# EAGLE board 612_jetracer_328_211 (EAGLE 9.6.0)
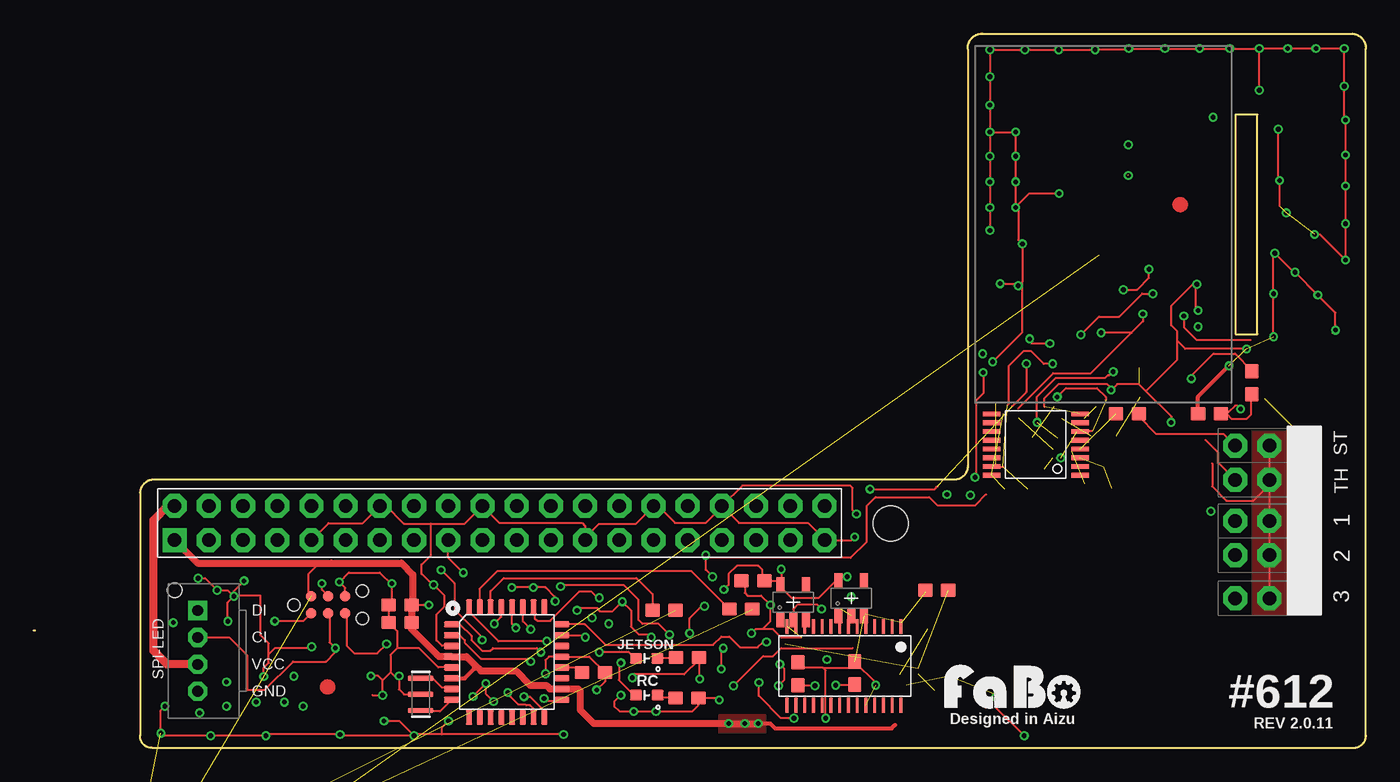
[diagram p0: board, top side]
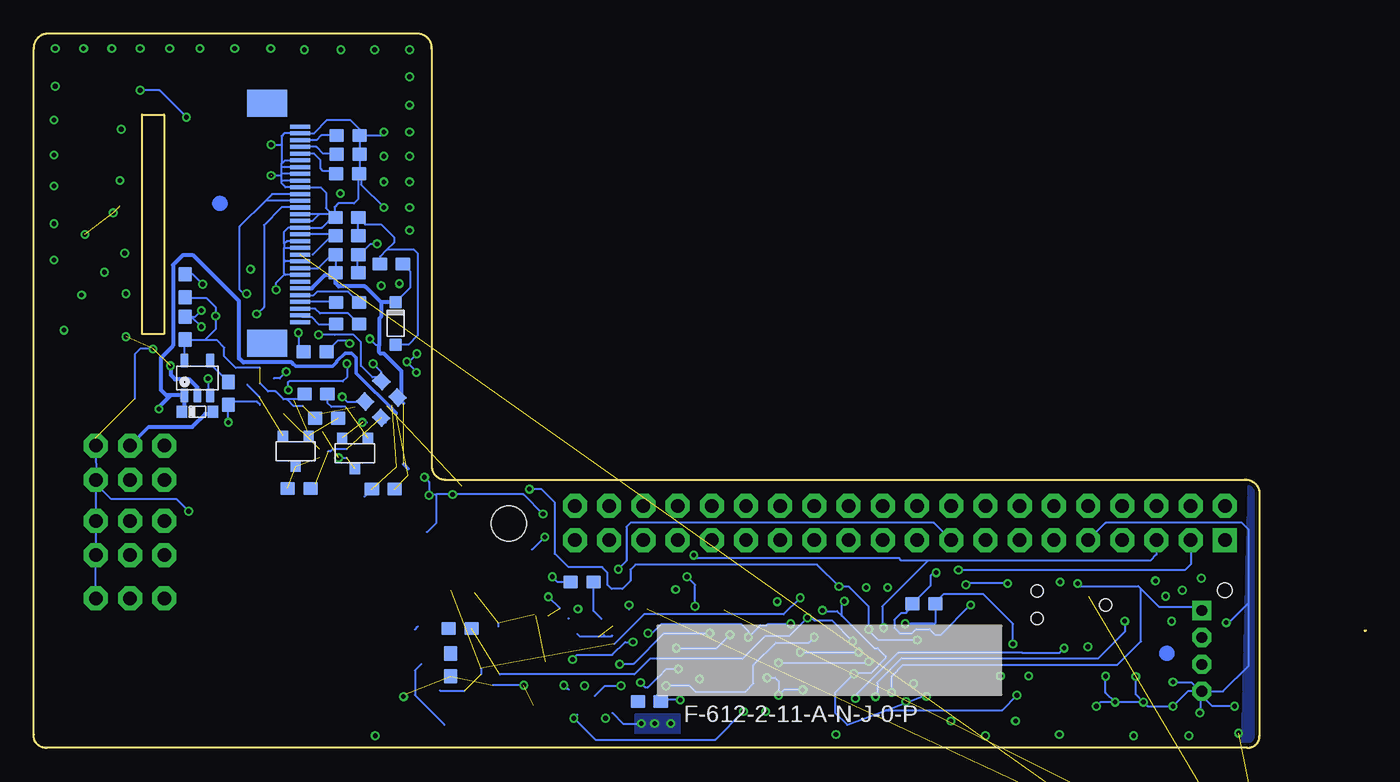
[diagram p1: board, bottom side, seen from below]

Size 98.91 x 53.01 mm. Coordinates in mm from the lower left corner, seen from the top.
Outline: 0.1,8.71 0,8.71
Outline: 69.35,51.86 69.35,20.91 arc-90 68.35,19.91 8.95,19.91 arc90 7.9,18.91 7.9,0.91 arc97 8.8,0.01 97.9,0.01 arc103 98.9,1.01 98.9,51.86 arc91 97.9,53.01 70.45,53.01 arc95 69.35,51.86
Outline: 90.87,30.72 90.87,47 89.23,47 89.23,30.72 90.87,30.72
Copper layers (1*16): Top 0.035mm / dielectric 1.6mm / Bottom 0.035mm
Design rules "PCBway": minimum track width 6mil, minimum drill 12mil, track to track 6mil, track to pad 6mil, pad to pad 6mil, via to via 6mil, smd to smd 6mil, copper to edge 10mil, drill to drill 10mil, minimum pad ring 10mil, minimum via ring 6mil, stop-mask expansion 2mil, vias tented up to drill 100mil, thermal gap 8mil
Holes 2.6 mm at 63.63,16.65
bRestrict: 8 lines

## Footprints (pad centres in the part's own frame; a part is rotated, then mirrored left to right if it is on the bottom)
FABO_BRICK_3PIN_HEADER = drill 1 pad 1.778 octagon: GND -2.54,0; I/O 2.54,0; VCC 0,0
0603 = smd 1.1 x 1: 1 -0.85,0; 2 0.85,0
0603-BOTTOM = smd 1.1 x 1 bottom: 1 -0.85,0; 2 0.85,0
1N4148W = smd 0.9 x 0.95: ANODE 0,0; CATHODE 3.15,0
CUS05F40 = smd 0.8 x 0.9: A -1.15,0; C 1.15,0
TQFP-32 = smd 1.1 x 0.45: 1 -4.1,2.8; 2 -4.1,2; 3 -4.1,1.2; 4 -4.1,0.4; 5 -4.1,-0.4; 6 -4.1,-1.2; 7 -4.1,-2; 8 -4.1,-2.8; 17 4.1,-2.8; 18 4.1,-2; 19 4.1,-1.2; 20 4.1,-0.4; 21 4.1,0.4; 22 4.1,1.2; 23 4.1,2; 24 4.1,2.8 | smd 0.45 x 1.1: 9 -2.8,-4.1; 10 -2,-4.1; 11 -1.2,-4.1; 12 -0.4,-4.1; 13 0.4,-4.1; 14 1.2,-4.1; 15 2,-4.1; 16 2.8,-4.1; 25 2.8,4.1; 26 2,4.1; 27 1.2,4.1; 28 0.4,4.1; 29 -0.4,4.1; 30 -1.2,4.1; 31 -2,4.1; 32 -2.8,4.1
JETSON_NANO_NOBOARDER = drill 1 pad 1.778 square: 1 1.27,1.27 | drill 1 pad 1.778 octagon: 2 1.27,3.81; 3 3.81,1.27; 4 3.81,3.81; 5 6.35,1.27; 6 6.35,3.81; 7 8.89,1.27; 8 8.89,3.81; 9 11.43,1.27; 10 11.43,3.81; 11 13.97,1.27; 12 13.97,3.81; 13 16.51,1.27; 14 16.51,3.81; 15 19.05,1.27; 16 19.05,3.81; 17 21.59,1.27; 18 21.59,3.81; 19 24.13,1.27; 20 24.13,3.81; 21 26.67,1.27; 22 26.67,3.81; 23 29.21,1.27; 24 29.21,3.81; 25 31.75,1.27; 26 31.75,3.81; 27 34.29,1.27; 28 34.29,3.81; 29 36.83,1.27; 30 36.83,3.81; 31 39.37,1.27; 32 39.37,3.81; 33 41.91,1.27; 34 41.91,3.81; 35 44.45,1.27; 36 44.45,3.81; 37 46.99,1.27; 38 46.99,3.81; 39 49.53,1.27; 40 49.53,3.81
TSSOP-16 = smd 0.36 x 1.3: 1 -2.275,-3.28; 2 -1.625,-3.28; 3 -0.975,-3.28; 4 -0.325,-3.28; 5 0.325,-3.28; 6 0.975,-3.28; 7 1.625,-3.28; 8 2.275,-3.28; 9 2.275,3.28; 10 1.625,3.28; 11 0.975,3.28; 12 0.325,3.28; 13 -0.325,3.28; 14 -0.975,3.28; 15 -1.625,3.28; 16 -2.275,3.28
PCA9685 = smd 0.3 x 1.1: 1 -4.15,-2.93; 2 -3.5,-2.93; 3 -2.85,-2.93; 4 -2.2,-2.93; 5 -1.55,-2.93; 6 -0.9,-2.93; 7 -0.25,-2.93; 8 0.4,-2.93; 9 1.05,-2.93; 10 1.7,-2.93; 11 2.35,-2.93; 12 3,-2.93; 13 3.65,-2.93; 14 4.3,-2.93; 15 4.3,2.92; 16 3.65,2.92; 17 3,2.92; 18 2.35,2.92; 19 1.7,2.92; 20 1.05,2.92; 21 0.4,2.92; 22 -0.25,2.92; 23 -0.9,2.92; 24 -1.55,2.92; 25 -2.2,2.92; 26 -2.85,2.92; 27 -3.5,2.92; 28 -4.15,2.92
SOT-23-5 = smd 0.6 x 1.05: 1 -0.95,-1.3; 2 0,-1.3; 3 0.95,-1.3; 4 0.95,1.3; 5 -0.95,1.3
TC2030 = smd 0.787 x 0.787: 1 1.27,-0.635; 2 1.27,0.635; 3 2.54,-0.635; 4 2.54,0.635; 5 3.81,-0.635; 6 3.81,0.635 | hole 0.889: 0,0; 5.08,-1.016; 5.08,1.016
0603' = smd 0.9 x 0.8: ANODE -0.8,0; CATHODE 0.8,0
1X03 = drill 1.016 long: 1 -2.54,0; 2 0,0; 3 2.54,0
SUPERSOT-3 = smd 0.76 x 0.76: D 0,1.15; G -0.95,-1.15; S 0.95,-1.15
SPI-B04B-PASK-1 = drill 0.8 pad 1.422 octagon: CI 1,1.27; GND -3,1.27; VCC -1,1.27 | drill 0.8 pad 1.422 square: DI 3,1.27 | hole 1.1: 4.5,2.97
ER-CON30HT-1 = smd 0.3 x 1.5 bottom: 1 7,-0.23; 2 6.5,-0.23; 3 6,-0.23; 4 5.5,-0.23; 5 5,-0.23; 6 4.5,-0.23; 7 4,-0.23; 8 3.5,-0.23; 9 3,-0.23; 10 2.5,-0.23; 11 2,-0.23; 12 1.5,-0.23; 13 1,-0.23; 14 0.5,-0.23; 15 0,-0.23; 16 -0.5,-0.23; 17 -1,-0.23; 18 -1.5,-0.23; 19 -2,-0.23; 20 -2.5,-0.23; 21 -3,-0.23; 22 -3.5,-0.23; 23 -4,-0.23; 24 -4.5,-0.23; 25 -5,-0.23; 26 -5.5,-0.23; 27 -6,-0.23; 28 -6.5,-0.23; 29 -7,-0.23; 30 -7.5,-0.23 | smd 2 x 3 bottom: 31 -9.07,-2.67; 32 8.74,-2.67
SOT-23 = smd 1.1 x 0.6: 1 -1.3,0.95; 2 -1.3,0; 3 -1.3,-0.95; 4 1.3,-0.95; 5 1.3,0.95
CSTNE_V_C = smd 0.4 x 1.9: 1 1.2,0; 2 0,0; 3 -1.2,0

## Placement (x,y rotation side)
1  [FABO_BRICK_3PIN_HEADER]  91.75,16.84 180 top
2  [FABO_BRICK_3PIN_HEADER]  91.75,14.3 180 top
3  [FABO_BRICK_3PIN_HEADER]  91.75,11.1 180 top
C1  0.1uF  [0603]  41.57,5.6 180 top
C2  10uF  [0603]  53.2,3.44 180 bottom
C3  0.1uF  [0603-BOTTOM]  27.2,9.31 180 bottom
C5  1uF  [0603-BOTTOM]  75.6,31.46 0 top
C6  1uF  [0603-BOTTOM]  75.6,33.06 0 top
C7  1uF  [0603-BOTTOM]  75.65,35.26 0 top
C8  1uF  [0603-BOTTOM]  75.65,36.61 0 top
C9  10uF  [0603-BOTTOM]  75.55,44.06 0 top
C10  10uF  [0603-BOTTOM]  75.55,45.46 0 top
C11  10uF  [0603-BOTTOM]  75.65,39.36 180 top
C12  10uF  [0603-BOTTOM]  27.2,10.61 180 bottom
C14  0.01uF  [0603]  84.45,26.31 90 bottom
C15  2.2uF  [0603]  87.65,31.16 270 bottom
C16  0.1uF  [0603-BOTTOM]  67.95,6.16 90 top
C20  0.1uF  [0603]  72.95,19.21 0 bottom
C21  1uF  [0603]  87.3,24.81 0 top
C24  0.1uF  [0603]  87.65,34.31 270 bottom
C27  0.1uF  [0603]  53.4,12.41 180 top
C28  0.1uF  [0603]  58.2,12.31 0 bottom
D1  1N4148  [1N4148W]  72.03,29.93 90 bottom
D2  CUS05F40  [CUS05F40]  86.75,24.96 180 bottom
IC1  [TQFP-32]  35.12,6.37 0 top
IC2  JETSON_NANO_NOBORDER  [JETSON_NANO_NOBOARDER]  9.19,14.15 0 top
IC3  MULTIPLEXERSMC74HC157A  [TSSOP-16]  74.4,22.51 90 top
IC4  [PCA9685]  60.24,6.09 180 top
IC5  [SOT-23-5]  86.75,27.46 0 bottom
ICSP1  [TC2030]  19.33,10.62 0 top
JETSON  GREEN  [0603']  45.52,3.92 0 top
JP1  PINHD-1X3  [1X03]  4.09,-12.69 0 top  (outside the outline)
Q1  MOSFET-N_FDN335N  [SUPERSOT-3]  79.45,22.01 180 bottom
Q2  MOSFET-N_FDN335N  [SUPERSOT-3]  75.05,21.86 180 bottom
R1  10K  [0603]  56.75,5.51 270 top
R2  10K  [0603]  32.8,10.71 180 bottom
R3  10K  [0603]  60.95,5.56 270 top
R5  470  [0603]  48.55,6.71 180 top
R7  10k  [0603-BOTTOM]  72.35,35.91 180 top
R8  100  [0603-BOTTOM]  75.65,38.01 180 top
R9  390K  [0603-BOTTOM]  75.6,42.61 0 top
R10  1K  [0603]  48.5,3.71 180 top
R11  5.1K  [0603]  77.95,26.26 180 bottom
R12  1K  [0603]  46.8,10.21 180 top
R13  1K  [0603]  52.5,10.31 180 top
R14  10K  [0603]  73.7,25.11 315 bottom
R18  5.1K  [0603]  77.15,24.46 180 bottom
R19  10K  [0603]  79.2,19.26 0 bottom
R20  0  [0603]  81.2,24.81 0 top
R22  10K  [0603]  78,29.41 0 bottom
R23  10K  [0603]  72.48,26.61 315 bottom
R24  4.7K  [0603]  67.05,11.71 0 top
R28  10k  [0603-BOTTOM]  2.19,-18.41 0 top  (outside the outline)
R30  220  [0603]  67.25,8.86 0 bottom
R31  0  [0603]  90.45,27.11 90 top
RC  RED  [0603']  45.51,6.65 0 top
SPI-LED  FABO-SPI-LED-B04B  [SPI-B04B-PASK-1]  13.44,7.2 90 top
ST  [FABO_BRICK_3PIN_HEADER]  91.75,22.44 180 top
TH  [FABO_BRICK_3PIN_HEADER]  91.75,19.9 180 top
U1  [ER-CON30HT-1]  78.9,39.11 90 top
U$1  [MARK_POINT_3MM]  85.12,40.32 0 top
U$2  [MARK_POINT_3MM]  85.08,40.41 0 bottom
U$3  [MARK_POINT_3MM]  14.78,7.02 0 bottom
U$6  [MARK_POINT_3MM]  21.83,4.52 0 top
U$9  SN74LVC1G17  [SOT-23]  60.7,11.11 90 top
U$10  SN74LVC1G17  [SOT-23]  56.4,10.81 90 top
U$11  [LOGO_FABO_MS]  72.67,2.55 0 top
X2  16MHz  [CSTNE_V_C]  28.74,3.97 90 top

## Library data of the parts
1-3 ST TH = FaBo-Template
C1-C3 C5-C12 C14-C16 C20 C21 C27 C28 = FaBo-Capacitor
C24 = FaBo-Capacitor; SPICEPREFIX: C
D1 D2 = FaBo-Diode
IC1 ICSP1 X2 = component
IC2 = FaBo-Boards
IC3 = FaBo-Multiplexers
IC4 = FaBo-Motor
IC5 = FaBo-Supply
JETSON RC = FaBo-LED
JP1 = Connector; CATEGORY: CONNECTOR; SUB-CATEGORY: PIN-HEADER
Q1 Q2 = FaBo-Mosfet
R1-R3 R5 R7-R14 R18-R20 R22-R24 R28 R30 R31 = FaBo-Resistors
SPI-LED = FaBo-Connetor
U1 = FaBo-Display
U$1-U$3 U$6 = FaBo-etc
U$9 U$10 = FaBo-LogicIC
U$11 = FaBo-Logo

## Nets
0: 1.GND 2.GND 3.GND C14.1 C15.1 C20.1 C21.1 C24.1 IC3.8 IC3.15 IC5.2 ST.GND TH.GND
3V3: C3.2 C12.2 C27.1 C28.1 IC1.4 IC1.6 IC1.18 IC2.1 IC2.17 ICSP1.2 R2.2 R28.2 U$9.5 U$10.5
5V: IC2.2 SPI-LED.VCC
AVR_MISO: IC1.16 ICSP1.1
AVR_MOSI: IC1.15 ICSP1.4 SPI-LED.DI
AVR_RESET: IC1.29 ICSP1.5 R2.1
AVR_RX: IC1.30 R12.2
AVR_SCK: IC1.17 ICSP1.3 SPI-LED.CI
AVR_TX: IC1.31 R13.2
CE0: IC2.24
D3: IC1.1 RC.ANODE
D4: IC1.2 JETSON.ANODE
GND: C1.1 C2.1 C3.1 C7.1 C8.1 C9.1 C10.1 C11.1 C12.1 C16.1 C27.2 IC1.3 IC1.5 IC1.21 IC2.9 IC2.14 IC2.20 IC2.25 IC2.30 IC2.34 IC2.39 IC4.1 IC4.14 IC4.24 ICSP1.6 JP1.3 R1.1 R3.1 R5.1 R9.1 R10.1 R24.1 SPI-LED.GND U1.2 U1.6 U1.7 U1.8 U1.9 U1.10 U1.14 U1.15 U1.16 U1.18 U1.19 U1.21 U1.23 U$9.3 X2.2
GPIO4: IC2.7
GPIO5: IC2.29
GPIO6: IC2.31
GPIO12: IC2.32
GPIO13: IC2.33
GPIO16: IC2.36
GPIO17: IC2.11
GPIO18: IC2.12
GPIO19: IC2.35
GPIO20: IC2.38
GPIO21: IC2.40
GPIO22: IC2.15
GPIO23: IC2.16
GPIO24: IC2.18
GPIO25: IC2.22
GPIO26: IC2.37
GPIO27: IC2.13
MISO: IC2.21
MOSI: IC2.19
N$2: IC1.23
N$3: IC3.3 Q1.D R19.1
N$4: C1.2 IC1.20
N$5: IC1.8 X2.3
N$6: JP1.1 R12.1
N$7: R3.2
N$8: IC4.25
N$15: IC1.7 X2.1
N$16: C6.2 U1.27
N$17: JP1.2 R13.1
N$19: R5.2 RC.CATHODE
N$20: JETSON.CATHODE R10.2
N$21: C6.1 U1.26
N$22: C5.1 U1.28
N$23: C5.2 U1.29
N$24: R9.2 U1.5
N$25: C9.2 U1.4
N$26: C10.2 U1.3
N$27: R8.1 U1.17
N$28: C11.2 D1.ANODE R7.1 R8.2
N$31: C14.2 IC5.4
N$32: IC5.3 R31.2
N$34: Q2.S
N$35: TH.I/O
N$36: R20.2 ST.I/O
N$37: Q1.S
N$39: Q2.G R11.1
N$40: Q1.G R18.1
N$42: IC3.6 Q2.D R14.1
N$43: R30.1
N$45: IC1.24
N$48: U$9.2
N$49: U$10.2
N$50: R28.1 U1.20
N$51: IC1.32
NC0: IC2.4
NC1: IC2.6
PCH1: IC3.2
PCH2: IC3.5
PCH3: IC1.26 R24.2
PCH_1: R30.2
RCH1: IC3.4 R20.1
RCH2: IC3.7
RX: IC2.10
S$2: R14.2 R19.2
S$6: IC3.1
S$7: C7.2 C8.2 D1.CATHODE R7.2 R22.2 R23.2 U1.22 U1.25
S$8: R22.1 U1.13
S$9: IC4.4
S$10: C28.2
S$11: IC4.3
S$12: IC4.5
S$13: IC4.2
S$15: IC4.7
S$16: IC4.6
S$18: C2.2
S$19: IC4.26
S$20: IC4.23
S$21: R1.2
S$22: IC4.28
S$23: IC4.27
S$25: C16.2
SCL: IC1.28 IC2.5
SCLK: IC2.23
SDA: IC1.27 IC2.3 R23.1 U1.11 U1.12
TX: IC2.8
VCC_R: C20.2 C21.2 D2.C IC3.16 IC5.1 R31.1
VCC_RC: 1.VCC 2.VCC 3.VCC D2.A ST.VCC TH.VCC
VCC_RC1: C15.2 C24.2 IC5.5 R11.2 R18.2

## Tracks (layer width: path | path; a pad name or v marks a point on that pad's centre or on a via)
0  (via drill 0.35)  (6 unrouted)
  Top 0.152: IC3.15 71.98,20.88 | 72.3,25.43 72.4,25.54 72.4,28.34 73.51,29.46 74.05,29.46 75,28.51 v75.65,28.51 | v80,26.56 80.08,26.63 | 80.08,26.63 80.45,27.01 82.05,27.01 82.55,26.51 | 82.55,26.51 82.6,26.51 84.9,28.81 84.9,30.21 | 75.05,25.31 75.05,25.96 76.11,27.01 79.7,27.01 80.08,26.63 | 84.9,30.21 84.9,30.91 84.45,31.36 84.45,32.81 86.05,34.41 86.3,34.41 | 86.3,34.41 v86.35,34.41 | v86.45,32.46 86.3,32.61 86.3,34.41 | v90.05,29.61 85.5,29.61 84.9,30.21 | 87.25,17.56 v87.4,17.56 | v84.45,24.16 84.45,24.61 82.55,26.51 | 95.23,22.44 ST.GND | 96.45,30.81 v96.65,31.01 96.65,32.31 v95.35,33.61 v93.65,35.31 93.55,35.31 v92.15,36.71 92.05,36.61 v92.05,33.71 v92.05,30.51
  Top 0.305: C21.1 86.45,26.05 v88.75,28.35
  Bottom 0.152: 91.4,25.92 91.4,29.21 91,29.61 v90.05,29.61 | 94.33,22.99 94.33,22.48 ST.GND 94.28,19.82 TH.GND 94.29,19.61 | v80,26.56 80,27.16 79.95,27.21 75.95,27.21 75.65,27.51 v75.65,28.51 | 3.GND 2.GND 94.27,14.32 94.31,14.36 1.GND 94.31,16.96 94.29,19.61 | 88.7,28.3 v88.75,28.35 | 82.1,25.46 82.35,25.71 84.2,25.71 C14.1 v84.45,24.16 | C20.1 74.35,18.66 | v86.35,34.41 87.1,35.16 C24.1 | 87.2,32.01 86.9,32.01 v86.45,32.46 | v86.45,31.26 87.2,32.01 | 87.2,32.01 C15.1 | v87.4,17.56 88.3,18.46 93.15,18.46 94.29,19.59 94.29,19.61
  Bottom 0.305: IC5.2 86.75,26.76 87.35,27.36 88.4,27.36 88.7,27.66 88.7,28.3
3V3  (via drill 0.35)  (1 unrouted)
  Top 0.152: 28.05,11.41 28.15,11.41 | 28.15,10.61 v29.34,10.61 | ICSP1.2 20.4,11.45 20.4,12.91 21.2,13.71 22.1,13.71 | 55.42,12.48 55.35,12.41 C27.1 54.1,12.56 54.1,13.21 53.8,13.51 52.2,13.51 51.6,12.91 51.6,12.11 v51.24,11.75 | 55.42,12.48 55.52,12.58 55.52,13.22 v55.5,13.25 | v60.4,12.71 60.3,12.71 60.2,12.81 60.15,12.81 U$9.5 59.55,12.41 58.25,11.11 56.3,11.11 55.45,11.96 U$10.5 55.42,12.08 55.42,12.48 | v31.9,13.01 30.78,14.13 IC2.17
  Top 0.305: 28.05,11.41 C12.2 | 39.2,4.38 IC1.18 | v53.8,1.81 54.7,1.81 55.05,1.46 63.7,1.46 63.95,1.7 | IC1.6 32.01,5.17 32.7,5.86 32.7,6.21
  Top 0.508: IC2.1 12.17,13.71 22.1,13.71 27.3,13.71 28.15,12.86 28.15,11.41 28.15,10.61 | C12.2 C3.2 28.05,8.81 30.09,6.77 IC1.4 32.14,6.77 32.7,6.21 33.2,5.71 35.8,5.71 36.87,4.64 38.07,4.64 38.32,4.38 39.2,4.38 | v53.8,1.81 v52.8,1.81 v51.6,1.81 41.6,1.81 40.6,2.81 40.6,4.21 40.44,4.37 IC1.18
  Bottom 0.152: v29.34,10.61 31.54,8.41 32,8.41 32.4,8.81 33.4,8.81 33.7,8.51 34.6,8.51 35,8.91 35,9.51 34.5,10.01 34.15,10.01 33.65,10.57 R2.2 32.3,12.06 32.3,12.81 32.1,13.01 v31.9,13.01 | v53.8,1.81 55.15,1.81 55.94,2.6 | C28.1 60,12.31 v60.4,12.71 | IC2.17 32.07,16.71 54.6,16.71 54.9,16.41 54.9,13.91 55.5,13.31 v55.5,13.25
  pour Top (no thermals): 50.9,2.46 54.3,2.46 54.3,1.11 50.9,1.11
  pour Bottom (no thermals): 50.9,2.46 54.25,2.46 54.25,1.11 50.9,1.11
5V
  Top 0.61: SPI-LED.VCC 9.91,6.2 8.9,7.21 8.9,16.91 9.95,17.96 IC2.2
AVR_MISO  (via drill 0.35)
  Top 0.152: ICSP1.1 20.02,9.41 v17.9,9.41 | v36.4,3.81 36.85,3.81 37.92,2.73 IC1.16
  Bottom 0.152: v36.4,3.81 36.28,3.93 36.28,4.86 34.48,6.66 19.85,6.66 17.9,8.61 v17.9,9.41
AVR_MOSI  (via drill 0.35)
  Top 0.152: ICSP1.4 21.4,11.72 v21.4,12.21 | IC1.15 37.12,2.89 36.85,3.16 36.56,3.16 36.5,3.21 35.99,3.21 35.2,4.01 v35.2,4.11
  Bottom 0.152: v21.4,12.21 21.2,12.01 16.9,12.01 16.7,11.81 | SPI-LED.DI 12.43,10.46 15.35,10.46 16.7,11.81 | 16.7,11.81 16.7,7.91 18.45,6.16 34.38,6.16 35.2,5.33 v35.2,4.11
AVR_RESET  (via drill 0.35)
  Top 0.152: ICSP1.5 23.24,9.88 23.24,7.57 23.8,7.01 25.5,7.01 v26.2,7.71 | v34.2,9.21 34.72,9.73 IC1.29
  Bottom 0.152: v26.2,7.71 26.2,9.21 28.4,11.41 31.35,11.41 32.2,10.56 31.95,10.56 | v34.2,9.21 32,9.21 31.95,9.26 31.95,10.56 | R2.1 31.95,10.56
AVR_RX
  Top 0.152: R12.2 45.95,11.41 44.75,12.61 34.9,12.61 33.92,11.63 IC1.30 34,10.55
AVR_SCK  (via drill 0.35)
  Top 0.152: SPI-LED.CI 14.51,8.2 15.85,6.86 15.85,4.31 17.15,4.31 19.25,6.41 21.7,6.41 22.4,7.11 v22.4,7.41 21.97,7.84 21.97,9.88 ICSP1.3 | v37.89,3.66 38.04,3.51 39.16,3.51 IC1.17
  Bottom 0.152: v22.4,7.41 22.75,7.06 25.51,7.06 25.52,7.05 34.72,7.05 38.07,3.7 37.85,3.7 | v37.89,3.66 37.85,3.7 | 37.85,3.7 37.79,3.7
AVR_TX
  Top 0.152: IC1.31 33.16,10.44 33.1,10.5 33.1,11.81 34.4,13.11 48.85,13.11 R13.2
D3  (via drill 0.35)
  Top 0.152: v37.65,7.11 37.35,7.41 34.1,7.41 33.9,7.21 33.3,7.21 32.5,8.01 32.5,8.31 31.64,9.17 IC1.1 | RC.ANODE 44.66,6.65 44.2,7.11 v42.01,7.11 v42,7.1
  Bottom 0.152: v42,7.1 v41.99,7.11 v37.65,7.11
D4  (via drill 0.35)
  Top 0.152: IC1.2 31.64,8.37 32,8.01 32,7.8 33.19,6.61 36.69,6.61 v36.9,6.41 | JETSON.ANODE 44.57,3.92 43.45,5.04 43.45,6.16 v43.6,6.31
  Bottom 0.152: v36.9,6.41 37.1,6.41 37.2,6.31 v43.6,6.31
GND  (via drill 0.35)  (12 unrouted)
  Top 0.152: IC1.5 30.04,5.97 28.6,7.41 27,7.41 | 26.5,5.61 26.5,6.91 27,7.41 | ICSP1.6 23.14,11.87 v22.7,12.31 23.4,13.01 25.7,13.01 26.6,12.11 | IC1.3 30.32,7.57 29.9,7.99 29.9,9.91 30.5,10.51 30.5,11.31 v29.7,12.11 29.6,12.11 28.8,12.91 28.8,13.61 29.5,14.31 29.5,16.64 | 26.6,12.11 26.6,10.86 C12.1 C3.1 27,8.66 27,7.41 | 26.6,12.11 v26.6,12.21 | 40.94,15.61 40.94,16.47 40.7,16.71 34.57,16.71 IC2.20 32,16.64 29.5,16.64 | 40.94,15.61 IC2.25 | 40.94,15.61 41.94,16.61 44.67,16.61 IC2.30 46.35,17.96 47.6,16.71 49.9,16.71 51.1,17.91 IC2.34 | IC2.34 52.35,16.71 57.5,16.71 58.72,15.49 IC2.39 60.72,15.42 v60.96,15.66 | IC2.9 21.89,16.68 24.43,16.68 IC2.14 26.15,17.96 27.47,16.64 29.5,16.64 | v38,5.51 38,6.51 38.26,6.77 IC1.21 41.25,6.77 C1.1 42.42,4.93 v41.8,4.31 | 25.9,5.01 v25.9,3.91 25.15,3.91 | v71,45.71 v72.9,45.71 v72.9,43.91 v72.9,42.01 v72.9,40.11 | v71,45.71 v71,43.91 v71,42.01 v71,40.11 v71,38.41 | v80.9,34 81.93,34 82.81,34.89 v82.81,35.53 | v76.13,41.15 73.94,41.15 v72.9,40.11 | 25.9,5.01 25.56,5.34 v25.04,5.34 | 26.5,5.61 25.9,5.01 | X2.2 27.5,3.97 27.13,4.34 v27.13,5.34 26.77,5.34 26.5,5.61 | v32.62,3.82 v33.57,4.77 33.57,4.01 v34.14,3.44 | IC2.34 52.61,19.46 60.64,19.46 60.8,19.3 60.8,17.65 v61.09,17.36 | v71,45.71 v71,47.71 v71,49.81 v71,51.81 v73.6,51.81 v76.1,51.81 v78.8,51.81 81.2,51.81 v81.3,51.91 v83.99,51.91 v86.56,51.91 v88.8,51.91 v91,51.91 | v91,48.81 v91,51.91 | v72.9,40.11 73.1,39.91 73.1,37.71 v73.4,37.41 73.4,34.61 | v43.6,3.91 43.1,3.41 43.1,3.11 43.5,2.71 v44.55,2.71 v46.2,2.71 48.9,2.71 49.35,3.16 R10.1 50.75,3.71 v50.9,3.56 | v44.45,5.21 44.45,5.36 44.55,5.46 48.3,5.46 49.4,6.56 R5.1 49.4,5.16 v49.45,5.11
  Top 0.152: 73.4,34.61 v73.1,34.31 72.95,34.46 v71.75,34.46 | v14.42,9.39 14.42,10.8 v14.86,11.24 | v14.86,11.24 v14.87,11.24 | v14.87,11.24 14.92,11.3 16.85,11.3 16.85,8.36 17.45,7.76 17.45,6.96 | v17.09,5.3 17.09,5.94 17.45,6.31 17.45,6.96 | v20.63,7.5 20.54,7.4 17.89,7.4 17.45,6.96 | R1.1 57.15,5.96 58.6,5.96 | 58.6,5.96 60.5,5.96 R3.1 62.52,4.84 v62.52,4.66 | v71.2,28.66 73.4,30.86 73.4,34.61 | v58.8,2.21 58.8,5.76 58.6,5.96 | v45.85,8.21 45.65,8.41 44.95,8.41 44.35,9.01 44.35,10.21 v43.7,10.86 42.95,10.11 42.1,10.11 41.85,10.36 40.5,10.36 v40.35,10.21 | v71.45,3.81 71.25,4.01 | v70.5,27.86 70.5,26.31 69.94,25.75 69.94,20.23 69.89,20.18 v69.89,20.08 | 61.75,9.91 U$9.3 | C27.2 52.8,12.16 52.8,11.51 53,11.31 54,11.31 v54.7,10.61 54.7,9.41 54.1,8.81 | 70.65,3.01 v71.45,3.81 | R24.1 66.2,11.56 | 57,8.21 55.5,8.21 54.9,8.81 54.1,8.81 | 54.1,8.81 53.6,8.81 v53.3,8.51 | v95.1,38.11 95.5,38.11 v97.4,36.21 v97.4,38.91 v97.4,41.71 v97.4,44.01 v97.4,46.61 97.3,46.71 v97.3,49.11 v97.3,51.91 v95.2,51.91 v93.1,51.91 v91,51.91 | v35.5,11.91 v37.1,11.91 38,11.91 38.72,11.19 v38.72,10.89 | v73.55,0.89 71.45,2.99 v71.45,3.81 | v39.35,1 30.3,1 | 30.3,1 28.35,1 v28.25,0.89 | v28.25,0.89 22.85,0.89 v22.75,1 17.35,1 v17.25,0.89 v13.15,0.89 9.65,0.89 v9.45,1.09 9.45,2.79 v9.75,3.1 | v26.01,2 27.15,2 v28.25,0.89 | v30.81,2 30.3,1.49 30.3,1 | 92.5,40.21 v92.5,42.11 92.4,42.21 v92.4,45.91 | v12.22,12.59 12.72,12.59 v13.62,11.7 14.41,11.7 v14.86,11.24 | v14.87,11.24 14.87,11.64 v15.62,12.39
  Bottom 0.152: C10.1 74.72,45.46 74.72,45.92 75.4,46.61 77.1,46.61 78.1,45.61 U1.2 80.3,45.61 80.5,45.41 80.5,44.8 | C7.1 74.88,35.28 74.88,36.53 C8.1 74.7,36.61 73.9,37.41 v73.4,37.41 | U1.6 80.25,43.61 80.5,43.36 | 74.68,42.56 R9.1 74.8,42.56 74.8,40.73 75.13,40.41 76.3,40.41 76.58,40.13 76.58,39.43 | v26.6,12.21 29.6,12.21 v29.7,12.11 | 12.1,4.2 SPI-LED.GND 12.25,4.2 | 12.1,4.2 10.61,4.2 8.7,6.11 8.7,10.76 | 8.7,10.76 8.7,16.21 9.2,16.71 19.33,16.71 IC2.9 | v25.9,3.91 27,2.81 35.6,2.81 | 35.6,2.81 38.5,1.71 39.4,2.61 39.4,4.11 v38,5.51 37.95,5.56 36.75,5.56 35.65,6.66 35.65,6.81 36.25,7.41 36.5,7.41 38.9,9.81 | 35.6,2.81 32.7,3.91 v32.62,3.82 | C10.1 C9.1 74.7,42.58 74.68,42.56 | 74.68,42.56 74.48,42.36 74.6,42.36 74.6,41.81 v72.9,40.11 | C11.1 76.58,39.43 | 76.58,39.43 76.62,39.48 | 76.62,39.48 76.75,39.61 | 76.75,39.61 77.7,39.61 | 77.7,39.61 U1.14 | 80.5,42.01 80.5,41.91 80.2,41.61 U1.10 77.6,41.61 77.2,41.21 77.2,40.06 76.75,39.61 | 80.5,42.01 80.5,42.52 | 80.5,42.52 80.5,42.61 | 80.5,42.61 80.5,43.11 | 80.5,43.11 80.5,43.36 | U1.7 80.5,43.11 | U1.8 80.5,42.61 | U1.9 80.4,42.11 80.5,42.01 | 80.5,44.8 80.5,43.36 | U1.15 78.2,39.11 77.7,39.61 | 76.62,39.48 77.5,38.61 U1.16 80,38.61 80.3,38.31 80.3,37.41 | U1.18 80.1,37.61 80.3,37.41 | 80.3,37.41 80.3,37.11 | 80.3,37.11 U1.19 | U1.21 80.2,36.11 80.3,36.21 | 80.3,36.21 80.3,37.11 | U1.23 80.2,35.11 80.26,35.17 | 80.26,35.17 80.3,35.21 80.3,36.21 | C10.1 73.15,45.46 v72.9,45.71 | v80.9,34 80.9,34.53 80.26,35.17 | v81.28,44.77 80.54,44.77 80.5,44.8 | 81.24,42.52 80.5,42.52 | 12.25,4.2 12.3,4.2 | 12.3,4.2 13.22,4.2 v14.32,3.1 16.21,3.1 v16.51,3.39 | v16.51,3.39 17.09,3.97 v17.09,5.3
  Bottom 0.152: v16.51,3.39 v18.61,3.39 | v18.61,3.39 19.32,4.11 v19.32,5.31 | v9.75,3.1 11.39,3.1 12.1,3.81 12.1,4.2 | v87.56,46.81 89.56,48.81 v91,48.81 | v44.45,5.21 43.85,5.21 43.6,4.96 v43.6,3.91 43.2,4.31 v41.8,4.31 | v12.32,2.6 12.25,2.66 12.25,4.2 | v14.32,4.89 14.28,4.86 12.96,4.86 12.3,4.2 | v10.37,9.3 10.16,9.3 8.7,10.76 | IC4.1 64.42,9.04 64.42,9.27 | 58.54,2.47 v58.8,2.21 57.2,0.61 48.3,0.61 v46.2,2.71 | 54.7,10.26 v54.7,10.61 54.6,10.61 | v40.35,10.21 40.35,10.16 39.25,10.16 38.9,9.81 | v70.5,27.86 70.5,27.96 71.17,28.63 | 71.17,28.63 v71.2,28.66 | v70.45,29.26 71.08,28.63 71.17,28.63 | v18.61,3.39 19.71,3.39 v20.01,3.1 | v61.09,17.36 62.54,18.81 v67.8,18.81 69,18.81 | v50.9,3.56 52.23,3.56 C2.1 | 69.5,18.81 v69.55,18.76 | 69.5,18.81 69.55,18.81 69.55,19.74 v69.89,20.08 | 69.5,18.81 69,18.81 | 69.7,16.01 69,16.71 69,18.81 | v62.52,4.66 64.8,4.66 | v53.3,8.51 53,8.51 52.3,9.21 46.4,9.21 45.85,8.66 v45.85,8.21 44.95,9.11 44.5,9.11 44.4,9.21 v42.7,9.21 | 38.9,9.81 38.9,10.71 v38.72,10.89 | 61.91,14.71 v60.96,15.66
  other vias: 81.28,42.48 93,39.71
  pour Bottom (rank 3): 6.35,0.51 6.35,24.43 8.55,26.63 9.3,-2.44
N$2  (via drill 0.35)
  Top 0.152: IC1.23 40.79,8.37 v40.95,8.21 | v51.95,4.61 54.15,6.81 54.9,6.81 55.5,7.41 60.8,7.41
  Bottom 0.152: v51.95,4.61 50.2,4.61 49.77,4.18 46.06,4.18 45.45,4.79 45.45,6.16 43.8,7.81 41.35,7.81 v40.95,8.21
N$3  (2 unrouted)
N$4
  Top 0.152: IC1.20 40.35,5.97 C1.2
N$5
  Top 0.152: 29.34,2.77 X2.3 28.8,2.71 30.16,2.71 IC1.8
N$6  (1 unrouted)
N$7  (via drill 0.35)
  Top 0.152: R3.2 60.9,4.66 v59.55,4.66
  Bottom 0.152: v59.55,4.66 59.3,4.41 59.25,4.41 59.19,4.35
N$15
  Top 0.152: IC1.7 30.92,4.47 30.34,4.47 29.63,5.17 X2.1
N$16
  Bottom 0.152: C6.2 76.5,33.11 U1.27
N$17  (1 unrouted)
N$19
  Top 0.152: RC.CATHODE 46.37,6.71 R5.2
N$20
  Top 0.152: R10.2 46.53,3.71 JETSON.CATHODE
N$21
  Bottom 0.152: U1.26 79.08,33.56 78.15,33.56 77.85,33.86 75.55,33.86 C6.1
N$22
  Bottom 0.152: C5.1 75.55,32.26 77.65,32.26 78,32.61 U1.28
N$23
  Bottom 0.152: U1.29 79.01,31.98 78.29,31.98 77.76,31.46 C5.2
N$24
  Bottom 0.152: R9.2 76.65,42.81 77.4,42.81 77.6,43.01 77.6,43.61 78.1,44.11 U1.5
N$25
  Bottom 0.152: C9.2 76.45,44.11 77.4,44.11 77.9,44.61 U1.4
N$26
  Bottom 0.152: C10.2 77.55,45.46 77.9,45.11 U1.3
N$27
  Bottom 0.152: R8.1 76.6,38.11 76.8,38.11 | 76.8,38.11 U1.17 | 78.2,36.61 76.8,38.01 76.8,38.11
N$28
  Bottom 0.152: R7.1 73.2,36.46 72.7,36.96 | 72.7,36.96 70.65,36.96 70.4,36.71 70.4,30.61 71.08,29.93 D1.ANODE | R8.2 C11.2 74.3,38.86 73.1,38.86 72.15,37.91 72.15,37.51 72.7,36.96
N$31
  Bottom 0.152: C14.2 85.8,28.51 IC5.4
N$32  (via drill 0.35)
  Top 0.152: v85.95,27.41 85.95,27.61 87.6,29.26 89.2,29.26 90.45,28.01 R31.2
  Bottom 0.152: v85.95,27.41 85.95,26.31 IC5.3
N$34  (via drill 0.35)  (1 unrouted)
  Top 0.152: v74.5,24.16 74.5,26.06 75.9,27.46 79.56,27.46 79.77,27.66 79.85,27.66 80.1,27.91 v80.15,27.91
  Bottom 0.152: 74.15,24.16 v74.5,24.16 | v80.15,27.91 80.63,27.43 81.08,27.43
N$35
  Top 0.152: TH.I/O 87.95,21.15 87.95,21.91 87,22.86
N$36
  Top 0.152: ST.I/O 88.35,23.29 83.37,23.29 82.05,24.61 R20.2
N$37  (1 unrouted)
  Bottom 0.152: 83.05,26.96 82.15,26.06
N$39  (1 unrouted)
  Bottom 0.152: R11.1 77.1,25.61 76.8,25.31 75.75,25.31
N$40  (1 unrouted)
N$42  (via drill 0.35)  (3 unrouted)
  Top 0.152: 77.46,23.46 IC3.6 77.51,23.51 78.6,23.51 | v75.99,26.05 76.65,26.71 78.95,26.71 79.6,26.06 79.6,25.81 | v76.27,21.52 75.93,21.52
  Bottom 0.152: v76.27,21.52 75.65,21.52 | v75.99,26.05 75.65,25.71 R14.1
N$43
  Bottom 0.152: 68.06,8.82 R30.1
N$45  (via drill 0.35)
  Top 0.152: IC1.24 40.92,9.17 42.44,7.65 50.44,7.65 51.05,8.26 51.65,8.26 52.44,7.46 53.74,7.46 54.14,7.86 v54.4,7.86
  Bottom 0.152: v54.4,7.86 55,7.86 55.95,6.91 58.55,6.91 v58.9,6.56 59,6.45
N$48  (via drill 0.35)  (1 unrouted)
  Bottom 0.152: 59.84,10.35 v60.7,11.21
N$49  (via drill 0.35)
  Top 0.152: v58.5,10.31 58.2,10.61 56.7,10.61 56.4,10.31 U$10.2
N$50  (1 unrouted)
PCH3  (via drill 0.35)  (3 unrouted)
  Top 0.152: IC1.26 37.13,10.47 37.2,10.4 37.2,9.62 37.4,9.42 38.35,9.42 40.54,11.61 41.4,11.61 41.86,11.15 v41.99,11.15
  Bottom 0.152: 68.75,4.26 66.9,4.26 | 65.7,5.91 65.7,5.46 | v41.99,11.15 43.24,9.91 53.6,9.91 55.8,7.71
PCH_1  (via drill 0.35)  (1 unrouted)
  Top 0.152: v38.1,7.91 34.5,7.91 32.35,10.06 32.35,10.41
  Bottom 0.152: v38.1,7.91 39.65,9.46 40.95,9.46 41.15,9.66 v41.45,9.66 42.8,8.31 44.58,8.31 46.28,6.61 53.15,6.61 54.3,5.46 64.3,5.46
RCH1  (1 unrouted)
S$1
  Bottom 0.152: 70.6,8.78 70.39,8.99
S$2  (2 unrouted)
  Bottom 0.152: 78,19.61 R19.2 | 77.05,22.01 76.87,22.01 76.7,22.18 75.66,22.18 | 72.76,24.17 R14.2
S$7  (via drill 0.35)  (1 unrouted)
  Top 0.152: v75.45,30.01 74.1,30.01 73.95,30.16 v73.95,30.36
  Bottom 0.152: U1.22 77.8,35.61 76.8,36.61 C8.2 C7.2 | R22.2 76.35,30.21 75.65,30.21 v75.45,30.01 | R7.2 70.95,35.36 70.95,34.16 D1.CATHODE | v73.95,30.36 73.5,29.91 73.25,29.91
  Bottom 0.254: 71.45,25.58 R23.2 | 71.1,20.71 71.45,21.06
  Bottom 0.305: U1.25 78.25,34.11 77.25,35.11 76.5,35.11 | 76.5,35.11 C7.2 | 76.5,35.11 76.5,34.51 76.25,34.26 74.3,34.26 73.12,33.08 | D1.CATHODE 73.12,33.08 | 73.12,33.08 73.12,31.99 73.25,31.86 73.25,29.91 73.25,29.36 73.15,29.26 72.9,29.26 71.6,27.96 71.6,26.29 R23.2
S$8  (via drill 0.35)
  Top 0.152: v82.35,32.21 82.35,31.66 81.5,30.81 | 81.5,30.81 v79.25,30.81 | 81.5,30.81 78.5,27.81 75.7,27.81 73.1,25.21
  Bottom 0.152: U1.13 80.5,40.11 81.8,38.81 81.8,32.71 82.3,32.21 v82.35,32.21 | R22.1 79.25,29.81 v79.25,30.81
S$10
  Bottom 0.152: C28.2 57.35,10.17 56.75,9.57
S$14
  Bottom 0.152: 58.55,8.46 58.35,8.26 56.45,8.26 | 56.59,8.4 56.45,8.26 | 55.95,8.36 56.05,8.26 56.45,8.26
S$17
  Bottom 0.152: 59.19,9.6 59.2,9.61
S$18
  Bottom 0.152: C2.2 54.31,3.17
S$21  (via drill 0.35)
  Top 0.152: v58,4.61 56.8,4.61 R1.2
  Bottom 0.152: 57.89,4.5 v58,4.61
S$26
  Bottom 0.152: 70.12,6.24 70.6,5.76 70.6,3.91 68.4,1.7
SCL  (via drill 0.35)
  Top 0.152: v35.8,8.91 35.52,9.19 IC1.28 | 70.7,18.81 69.9,18.01 67.1,18.01 66.5,18.61 62.5,18.61 61.85,17.96 61.85,15.31 60.65,14.11 50.1,14.11 v49.9,14.31 49.9,13.21 v50.4,12.71 | v55.4,6.21 55.7,5.91 55.7,5.01 v55.3,4.61 | v48.7,8.51 48.7,9.61 49.6,10.51 v49.8,10.51
  Bottom 0.152: IC2.5 15.54,14.37 16,13.91 32.5,13.91 | 32.5,13.91 34.5,13.91 34.7,14.11 49.7,14.11 v49.9,14.31 | 32.5,13.91 35.9,10.51 35.9,9.01 v35.8,8.91 | v55.3,4.61 56.5,4.61 57.24,3.87 | v55.4,6.21 55.35,6.26 54.34,6.26 52.1,8.51 v48.7,8.51 | v49.8,10.51 49.8,12.11 v50.4,12.71
SDA  (via drill 0.35)  (1 unrouted)
  Top 0.152: v30.25,13.21 31.25,12.21 31.25,10.21 31.45,10.01 31.5,10.01 33.3,8.21 v33.3,8.01 | v36.9,8.81 36.32,9.39 IC1.27 | v77.75,30.66 79.1,32.01 80.6,32.01 82.3,33.71 v83.1,33.71 | v73.7,28.51 73.7,26.41 72.65,25.36 | v62.1,19.21 66.9,19.21 67.1,19.41 | v56.45,2.21 55.5,2.21 53.85,3.86 v53.85,4.86 | v51.05,5.86 51.05,7.26 v51.2,7.41 | v47.2,8.41 46.4,9.21 45.2,9.21 44.9,9.51 44.9,11.01 43.82,12.08 39.23,12.08 v39.12,11.98
  Bottom 0.152: IC2.3 13,13.62 13.41,13.21 v30.25,13.21 | v33.3,8.01 36.2,8.01 36.9,8.71 v36.9,8.81 36.9,10.46 38.42,11.98 v39.12,11.98 40.75,13.61 54.23,13.61 54.6,13.24 54.6,12.41 55.2,11.81 56,11.81 56.3,12.11 56.3,13.01 56.7,13.41 59.2,13.41 60.2,14.41 60.2,18.21 61.2,19.21 v62.1,19.21 | U1.11 81.2,41.11 81.7,40.61 | 81.7,40.61 83.6,38.71 83.6,33.99 83.31,33.71 v83.1,33.71 | U1.12 81.7,40.61 | v77.75,30.66 76.53,30.66 75.15,30.66 74.6,30.11 74.6,28.36 73.75,27.51 73.38,27.51 R23.1 73.08,27.89 v73.7,28.51 | 56.59,2.35 v56.45,2.21 | v53.85,4.86 53.5,4.51 53.3,4.51 52.55,5.25 52.52,5.25 51.92,5.86 v51.05,5.86 | v51.2,7.41 48.2,7.41 v47.2,8.41
VCC_R  (via drill 0.35)  (2 unrouted)
  Top 0.152: R31.1 90.4,26.21 90.4,24.76 90.05,24.41 88.95,24.41 88.58,24.78 88.73,24.93 | C21.2 88.5,25.16 88.73,24.93 | 88.73,24.93 89.2,25.41 89.35,25.41 v89.6,25.16
  Bottom 0.254: 72,24.81 72,24.86 74.96,27.81 74.96,28.96 75.3,29.31 75.8,29.31 76.4,28.71 76.4,28.61 76.7,28.31 79.45,28.31 79.65,28.51
  Bottom 0.305: IC5.1 88.75,26.16 | 88.75,26.16 89.05,26.16 89.45,26.56 89.45,28.96 88.55,29.86 88.55,35.86 87.85,36.56 87.05,36.56 83.65,33.16 83.65,28.91 83.35,28.61 79.75,28.61 79.65,28.51 | IC5.1 87.9,25.96 | D2.C 87.7,25.16 IC5.1 | 88.75,26.16 89.6,25.31 v89.6,25.16
VCC_RC
  Top 0.152: 91.72,11.13 3.VCC 2.VCC 91.72,14.33 91.75,14.36 1.VCC TH.VCC | TH.VCC 91.77,19.78 91.77,19.57 90.55,18.36 88.55,18.36 87.5,19.41 87.5,21.11 | ST.VCC TH.VCC
  Bottom 0.254: 90.35,23.83 ST.VCC
  Bottom 0.305: 90.35,23.83 87.12,23.83 86.15,24.81 85.75,24.81 D2.A
  pour Top (no thermals): 90.5,23.51 92.95,23.51 92.95,9.86 90.5,9.86
VCC_RC1  (via drill 0.35)  (2 unrouted)
  Top 0.152: v85.4,32.06 85.4,31.21 86.35,30.26 90.35,30.26
  Bottom 0.152: 82.1,28.21 83.9,28.21 84.75,29.06 84.75,29.71 85.3,30.26 86.2,30.26 | 82.1,27.06 81.5,26.46 80.95,26.46 80.35,25.86 80.1,25.86 | 78.9,25.36 79.6,25.36 80.1,25.86 | R11.2 79.2,25.86 80.1,25.86 | C24.2 87.6,33.41 86.1,33.41 85.4,32.71 v85.4,32.06 85.4,31.06 86.2,30.26 | IC5.5 87.7,30.26 | 87.7,30.26 C15.2 | 86.2,30.26 87.7,30.26

## Text on the board
tPlace: JETSON | RC | Designed in Aizu | #612 | REV 2.0.11
bPlace: F-612-2-11-A-N-J-0-P
tDocu: OLED AREA | RX | TX | GND